# Altium PCB Assembly.PcbDoc
Units mm, origin at the board's own origin, x right, y up, seen from the top; angles counter-clockwise.
Board outline 209.39 x 186.94 mm, 2 copper layers (Top Layer, Bottom Layer); 4 components, 0 nets, 12 pads, 0 vias.
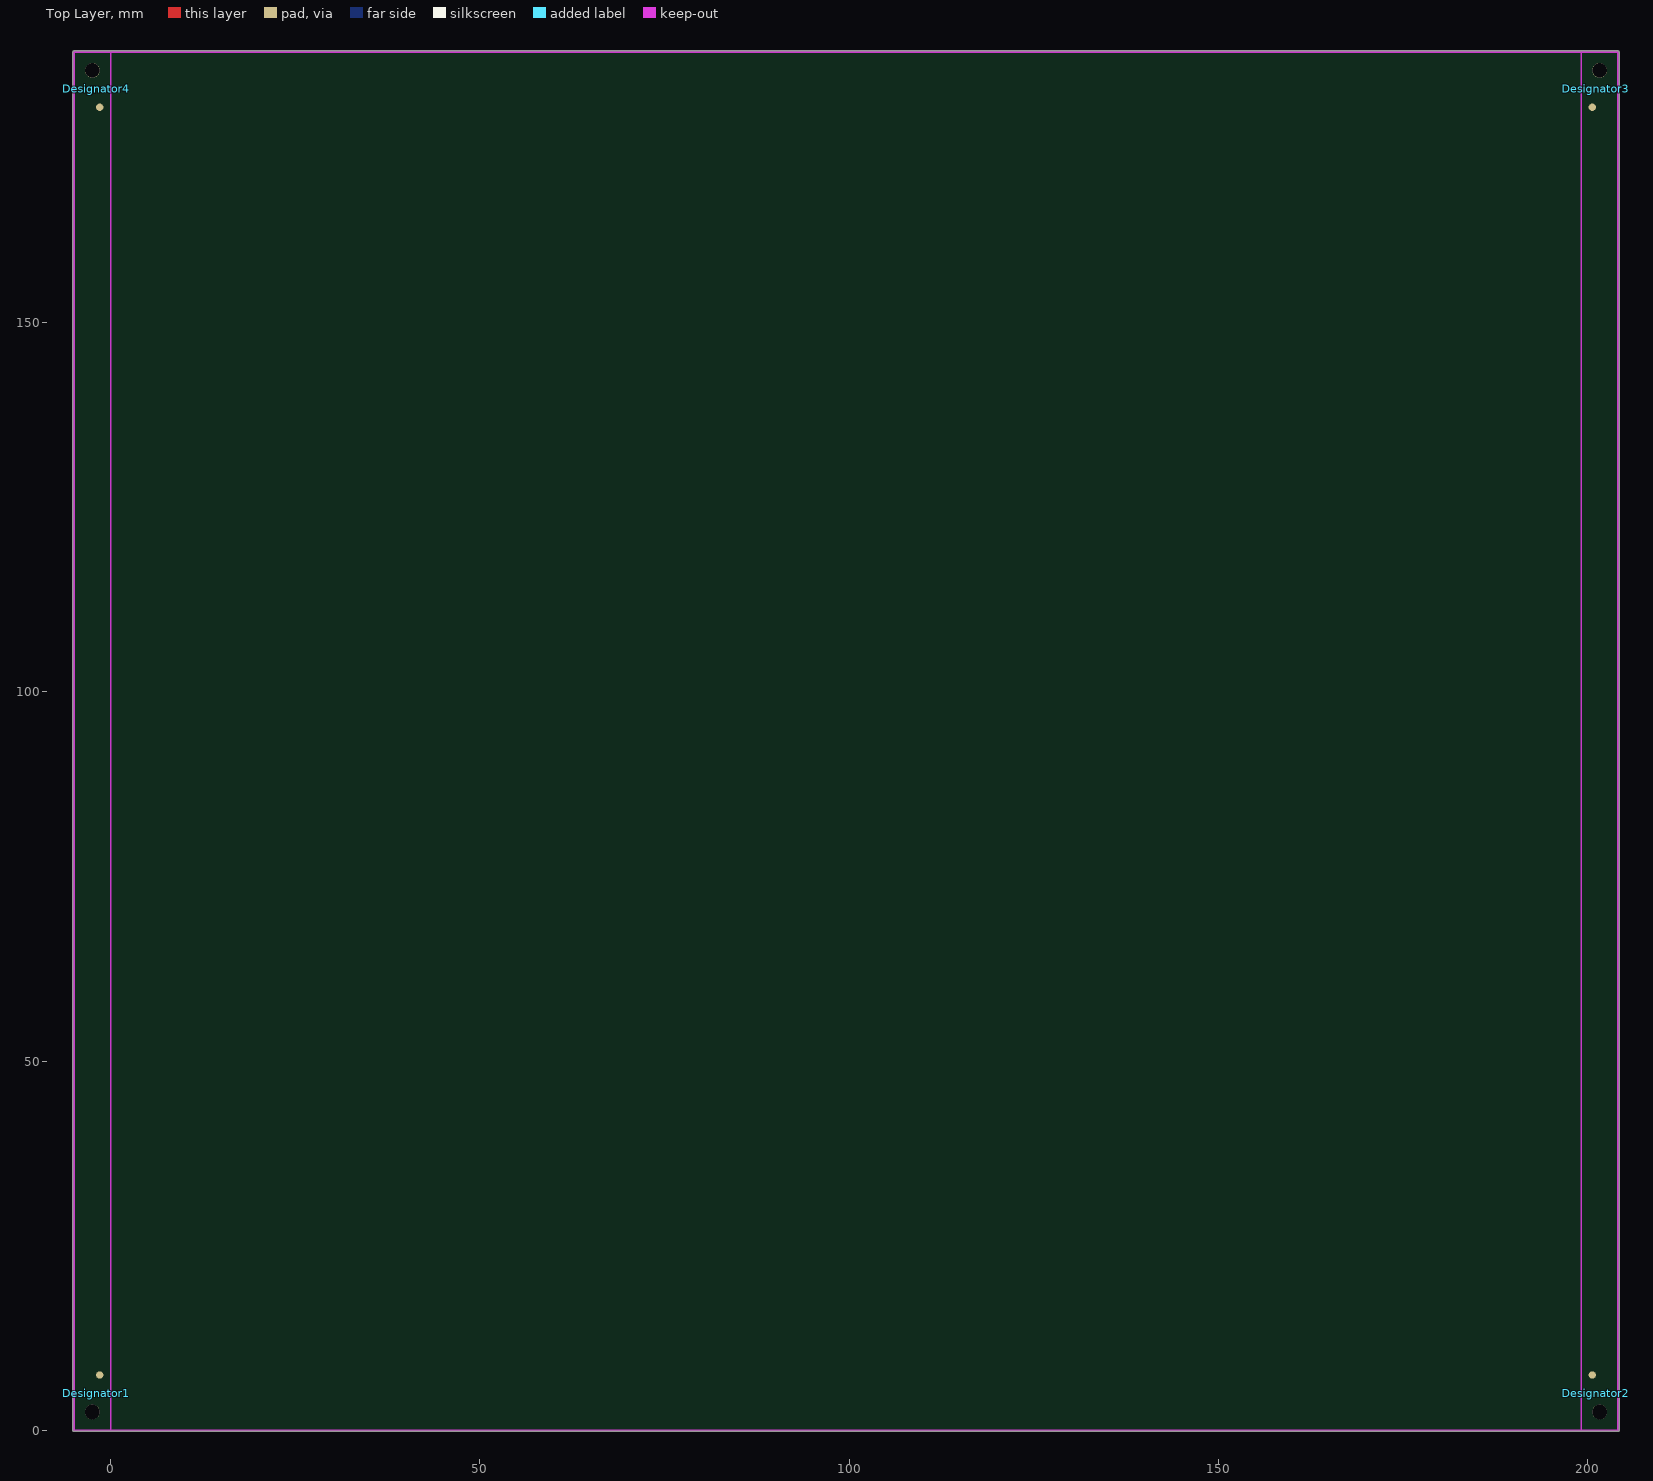
[diagram p0: Top Layer view]
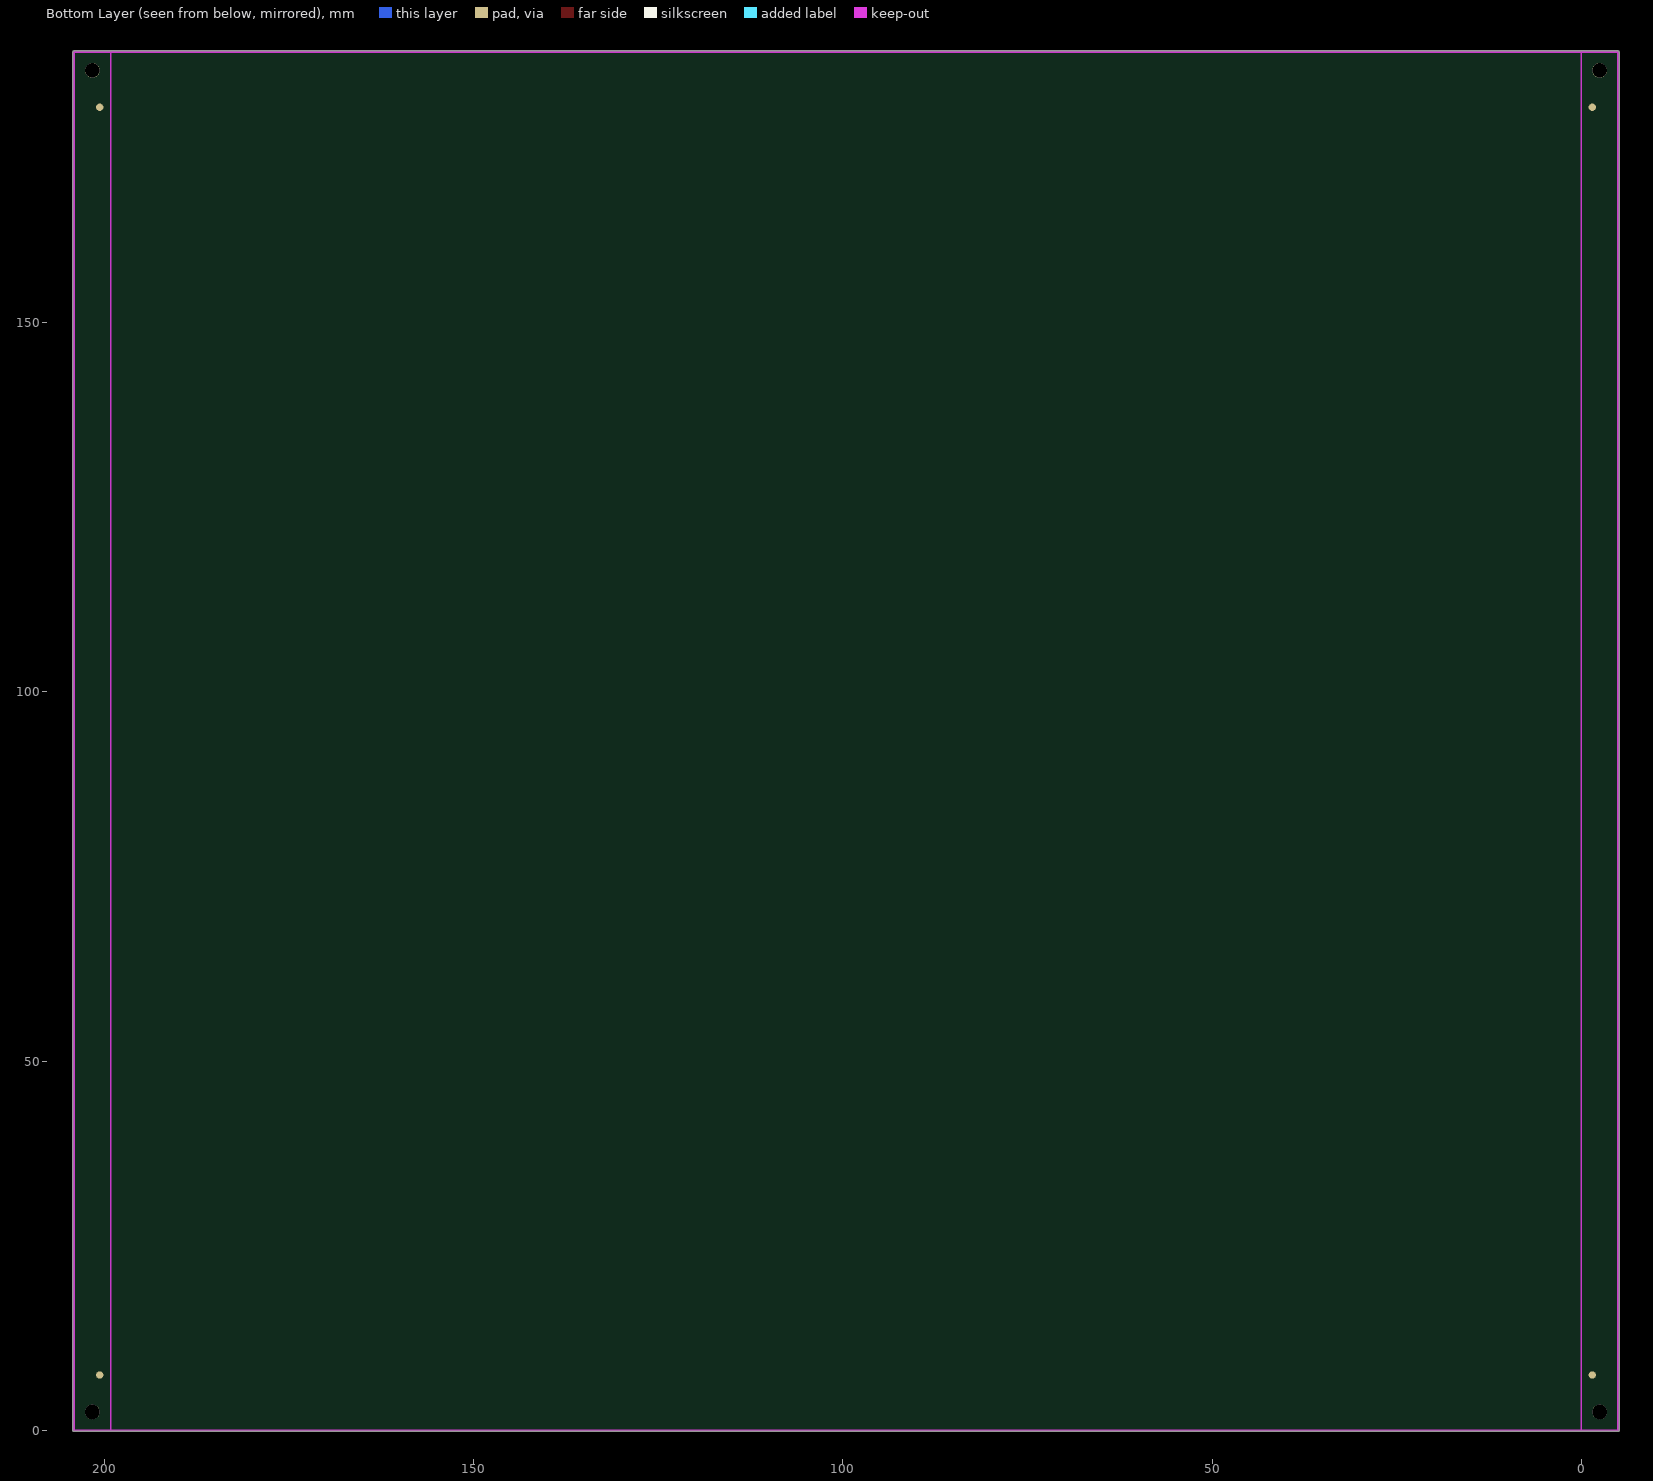
[diagram p1: Bottom Layer view, seen from below]

## Layer stack, top to bottom
Top Solder: solder mask 0.0102, Solder Resist, Dk 3.5
Top Layer: signal copper 0.0356
Dielectric 1: dielectric 0.32, FR-4, Dk 4.8
Bottom Layer: signal copper 0.0356
Bottom Solder: solder mask 0.0102, Solder Resist, Dk 3.5

## Board outline
-5,-0.127 cw(c-5,0) -5.127,0 -5.127,186.69 cw(c-5,186.69) -5,186.817 204.136,186.817 cw(c204.136,186.69) 204.263,186.69 204.263,0 cw(c204.136,0) 204.136,-0.127

## Design rules (kind name [scope] priority, off if disabled: settings)
Clearance [All] p1: gap=0.254 ignorepadtopadclearanceinfootprint=FALSE
PolygonConnect [All] p1: connectstyle=Relief reliefconductorwidth=0.254 reliefentries=4 polygonreliefangle="90 Angle" airgapwidth=0.254
RoutingVias [All] p1: holewidth=0.711 width=1.27 viastyle="Through Hole" minholewidth=0.711 minwidth=1.27 maxholewidth=0.711 maxwidth=1.27
SolderMaskExpansion [All] p1: expansion=0.102 istentingtop=FALSE
Width [All] p1: maxlimit=0.254 minlimit=0.254 preferedwidth=0.254
30 further rules are at their usual default settings.

## Components (designator, comment, footprint, x,y, rotation, side; value= is the part's Value field where it differs from the comment)
Designator1 "Comment" FM_004#1 -2.5,2.5 r0 top
Designator2 "Comment" FM_004#2 201.636,2.5 r180 top
Designator3 "Comment" FM_004#1 201.636,184.19 r180 top
Designator4 "Comment" FM_004#2 -2.5,184.19 r0 top

## Footprints (in the part's own frame and the unit in brackets; to place one, negate y for a bottom-side part, rotate by r counter-clockwise, add the part's x,y. Pads: shape width x height; smd on the part's side, far side on the other; paste and mask are expansions set on the pad)
FM_004#1 [mm]
  round 2 hole 2 unplated: 1(0,0)
  round 1 smd paste+0 mask+0.5: 1(1,5)
  round 1 smd far side paste+0 mask+0.5: 1(1,5)
FM_004#2 [mm]
  round 2 hole 2 unplated: 1(0,0)
  round 1 smd paste+0 mask+0.5: 1(1,-5)
  round 1 smd far side paste+0 mask+0.5: 1(1,-5)

## Nets (pads, with @x,y where several pads share a name; then routed paths per layer and width w, separated by ;. In a path a pad name is that pad's centre, name@x,y a point inside that pad or via, vN(x,y) a via of type N, cw(c..) or ccw(c..) an arc to the next point about the centre after c; other vN are vias at no path point)
pads on no net: Designator1.1 Designator2.1 Designator3.1 Designator4.1

## Keep-outs
Keep-Out Layer:
  lines w0.254: 0,0 -5,0 -5,186.69 0,186.69 ; 0,0 0,186.69 ; 0,0 0,186.69 ; 0,0 199.136,0 ; 0,186.69 199.136,186.69 ; 199.136,0 204.136,0 204.136,186.69 199.136,186.69 ; 199.136,0 199.136,186.69 ; 199.136,0 199.136,186.69

## Panel: embedded boards
"PCB.PcbDoc" at 0,0, 5 rows x 2 columns, spacing 37.338 x 99.568, rotation 0